# Altium PCB motor_driver.PcbDoc
Units mil, origin at the board's own origin, x right, y up, seen from the top; angles counter-clockwise.
Board outline 6000 x 4000 mil, 2 copper layers (Top Layer, Bottom Layer); 10 components, 9 nets, 41 pads, 0 vias.
Unrouted connection lines stored in the file: 30.
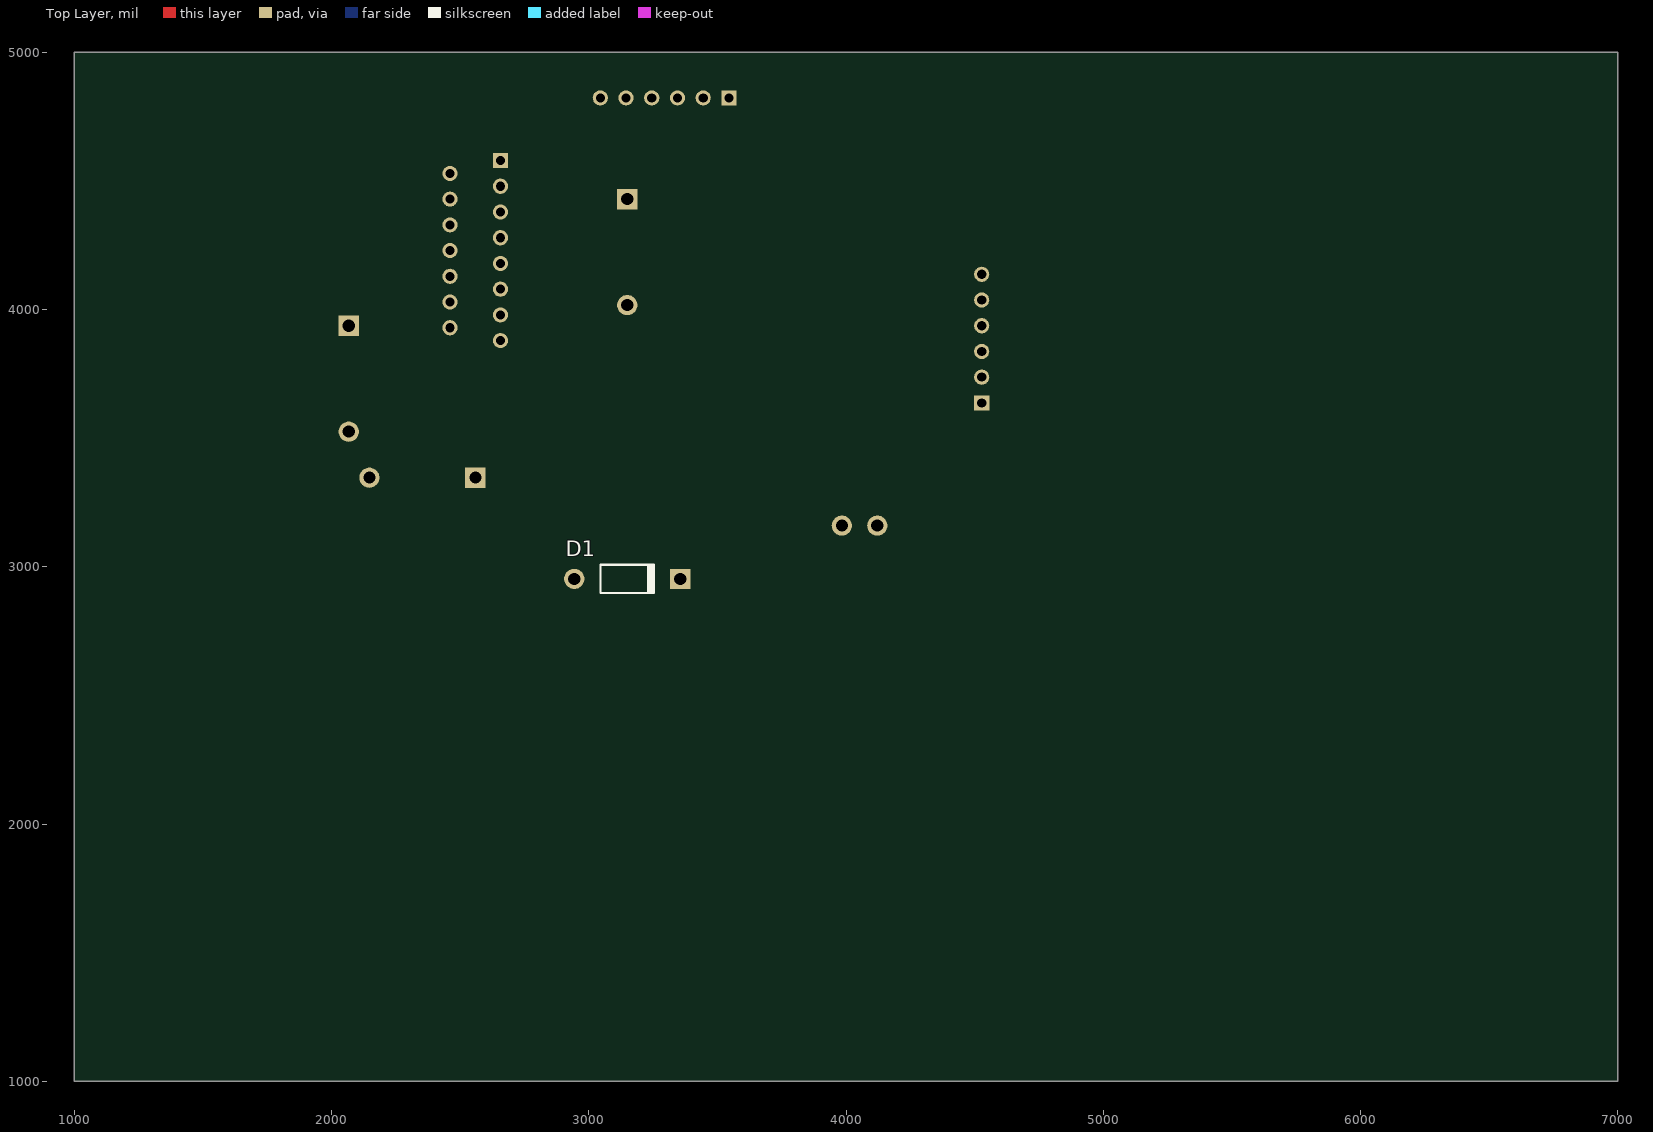
[diagram p0: Top Layer view]
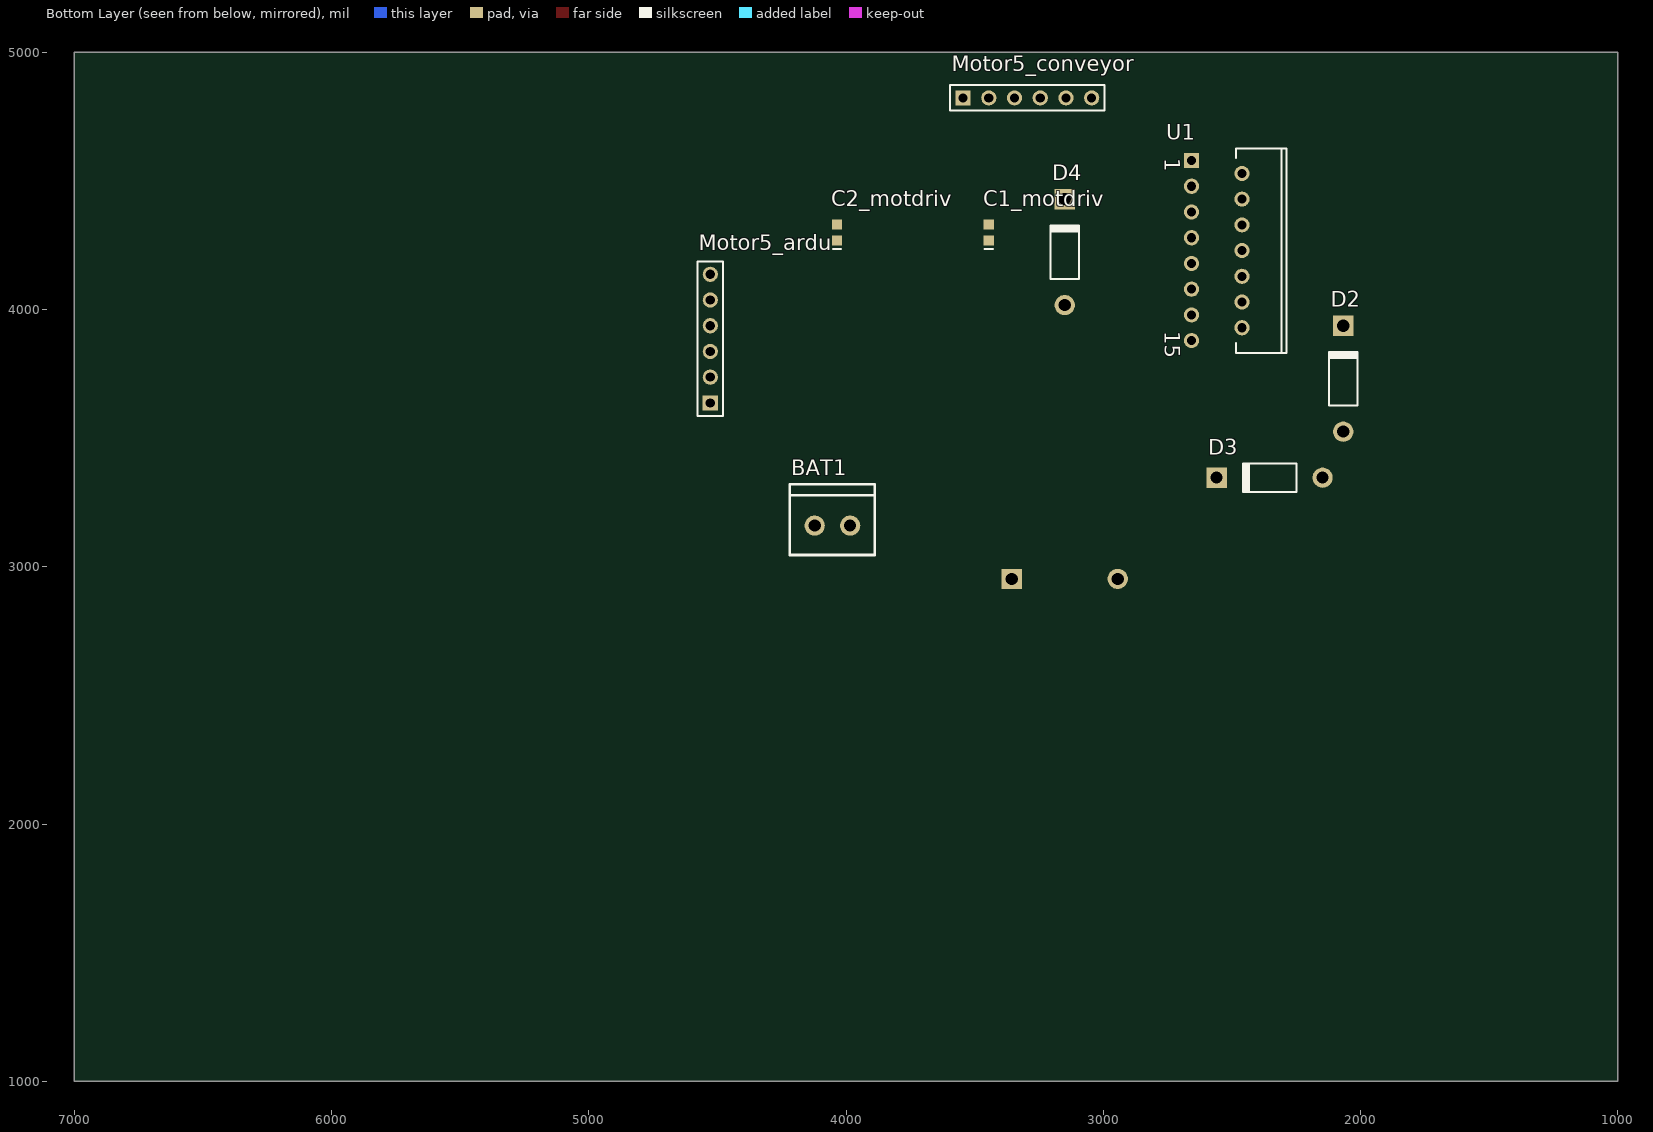
[diagram p1: Bottom Layer view, seen from below]

## Layer stack, top to bottom
Top Solder: solder mask 0.4, Solder Resist, Dk 3.5
Top Layer: signal copper 1.4
Dielectric 1: dielectric 12.6, FR-4, Dk 4.8
Bottom Layer: signal copper 1.4
Bottom Solder: solder mask 0.4, Solder Resist, Dk 3.5

## Board outline
1000,1000 7000,1000 7000,5000 1000,5000

## Design rules (kind name [scope] priority, off if disabled: settings)
Clearance [All] p1: gap=10 ignorepadtopadclearanceinfootprint=FALSE except(0: Arc-Hole Track-Hole SMDPad-Hole THPad-Hole Via-Hole Fill-Hole Poly-Hole Region-Hole Text-Hole)
PolygonConnect [All] p1: connectstyle=Relief reliefconductorwidth=10 reliefentries=4 polygonreliefangle="90 Angle" airgapwidth=10
RoutingVias [All] p1: holewidth=28 width=50 viastyle="Through Hole" minholewidth=28 minwidth=50 maxholewidth=28 maxwidth=50
SolderMaskExpansion [All] p1: expansion=4
Width [All] p1: maxlimit=10 minlimit=10 preferedwidth=10
30 further rules are at their usual default settings.

## Components (designator, comment, footprint, x,y, rotation, side; value= is the part's Value field where it differs from the comment)
BAT1 "Header 2" STL1550/2-3.5 4052.8,3160 r180 bottom
C1_motdriv "100nF" CAPC1608N 3444.88,4299.21 r90 bottom
C2_motdriv "100nF" CAPC1608N 4035.43,4299.21 r90 bottom
D1 "Diode 1N4001" DO-41 3149.61,2952.76 r0 top
D2 "Diode 1N4001" DO-41 2066.93,3731.1 r90 bottom
D3 "Diode 1N4001" DO-41 2353.15,3346.46 r0 bottom
D4 "Diode 1N4001" DO-41 3149.61,4223.23 r90 bottom
Motor5_ardu "Header 6" HDR1X6 4527.56,3637.01 r90 bottom
Motor5_conveyor "Header 6" HDR1X6 3544.88,4822.83 r180 bottom
U1 "L298N" MULTIWAT15 2558.66,4229.13 r270 bottom

## Footprints (in the part's own frame and the unit in brackets; to place one, negate y for a bottom-side part, rotate by r counter-clockwise, add the part's x,y. Pads: shape width x height; smd on the part's side, far side on the other; paste and mask are expansions set on the pad)
CAPC1608N [mm] "Chip Capacitor, Body 1.6x0.8mm, IPC Medium Density"
  rect 1x1 smd: 1(-0.8,0) 2(0.8,0)
  silkscreen extent -1.6,-0.4 -1.6,0.4, body extent -0.87,-0.48 0.87,0.48, height 0.85
DO-41 [mm] "Diode, Axial; Body 5.2 x 2.7 mm (LxDia. max), Lead Dia. 0.86 mm (max)"
  round 2 hole 1.2: 1(-5.23,0)
  rect 2x2 hole 1.2: 2(5.23,0)
  silkscreen extent -2.65,-1.4 2.75,1.4
HDR1X6 [mm] "Connector; Header; 6 Position"
  rect 1.5x1.5 hole 0.9: 1(0,0)
  round 1.5 hole 0.9: 2(2.54,0) 3(5.08,0) 4(7.62,0) 5(10.16,0) 6(12.7,0)
  silkscreen extent -1.27,-1.27 13.97,1.27
MULTIWAT15 [mm] "TO, Thru-Hole, Vertical, Heatsink Mounted; 15 Bent Staggered Leads; Pitch 1.27 mm"
  rect 1.5x1.5 hole 0.9: 1(-8.89,-2.49)
  round 1.5 hole 0.9: 2(-7.62,2.49) 3(-6.35,-2.49) 4(-5.08,2.49) 5(-3.81,-2.49) 6(-2.54,2.49) 7(-1.27,-2.49) 8(0,2.49) 9(1.27,-2.49) 10(2.54,2.49) 11(3.81,-2.49) 12(5.08,2.49) 13(6.35,-2.49) 14(7.62,2.49) 15(8.89,-2.49)
  silkscreen extent -10.1,1.89 10.1,6.89
STL1550/2-3.5 [mm] "STL1550 pin strip, 3.5 mm pitch"
  round 2 hole 1.2: 1(-1.75,0) 2(1.75,0)
  silkscreen extent -4.2,-2.9 4.2,4.1, body extent -4.2,-2.9 4.2,4.1, height 9.2

## Part data
BAT1: "Header, 2-Pin", LatestRevisionDate=17-Jul-2002, LatestRevisionNote="Re-released for DXP Platform.", Publisher="Altium Limited"
C1_motdriv C2_motdriv: library part Cap, "Capacitor", LatestRevisionDate=17-Jul-2002, LatestRevisionNote="Re-released for DXP Platform.", PackageDescription="Radial Cap, Thru-Hole; 2 Leads; 0.3 in Pin Spacing", PackageReference=RAD-0.3, Published=8-Jun-2000, Publisher="Altium Limited"
D1 D2 D3 D4: "1 Amp General Purpose Rectifier", Code_JEDEC=DO-204-AL, ComponentLink1Description="Manufacturer Link", ComponentLink1URL=http://www.fairchildsemi.com/, ComponentLink2Description=Datasheet, ComponentLink2URL=http://www.fairchildsemi.com/ds/1N%2F1N4001.pdf, DatasheetVersion=1998, LatestRevisionDate=17-Jul-2002, LatestRevisionNote="Re-released for DXP Platform.", PackageDescription="Diode, Axial; Body 5.2 x 2.7 mm (LxDia. max), Lead Dia. 0.86 mm (max)", PackageReference=DO-41, PackageVersion=Aug-1999, Published=8-Jun-2000, Publisher="Altium Limited"
Motor5_ardu Motor5_conveyor: "Header, 6-Pin", LatestRevisionDate=17-Jul-2002, LatestRevisionNote="Re-released for DXP Platform.", Publisher="Altium Limited"
U1: "Dual Full Bridge Driver", ComponentLink1Description="Manufacturer Link", ComponentLink1URL=http://www.st.com/, ComponentLink2Description=Datasheet, ComponentLink2URL=http://www.st.com/stonline/products/literature/ds/1773/l298.pdf, DatasheetVersion=Jul-1999, LatestRevisionDate=14-May-2007, LatestRevisionNote="Mapped to vertical PCB.", PackageDescription="TO, Thru-Hole, Vertical, Heatsink Mounted; 15 Bent Staggered Leads; Pitch 1.27 mm", PackageReference=Multiwatt15V, Published=8-Jun-2000, Publisher="Altium Limited"

## Nets (pads, with @x,y where several pads share a name; then routed paths per layer and width w, separated by ;. In a path a pad name is that pad's centre, name@x,y a point inside that pad or via, vN(x,y) a via of type N, cw(c..) or ccw(c..) an arc to the next point about the centre after c; other vN are vias at no path point)
7V2: BAT1.1 C2_motdriv.2 D1.2 D2.2 U1.4
GND: BAT1.2 C1_motdriv.1 C2_motdriv.1 D3.1 D4.1 Motor5_ardu.4 Motor5_conveyor.3 U1.1 U1.8 U1.10 U1.11 U1.12 U1.15
NetD1_1: D1.1 D3.2 Motor5_conveyor.1 U1.2
NetD2_1: D2.1 D4.2 Motor5_conveyor.2 U1.3
NetMotor5_ardu_1: Motor5_ardu.1 U1.5
NetMotor5_ardu_2: Motor5_ardu.2 U1.7
NetMotor5_ardu_5: Motor5_ardu.5 Motor5_conveyor.5
NetMotor5_ardu_6: Motor5_ardu.6 Motor5_conveyor.6
V5: C1_motdriv.2 Motor5_ardu.3 Motor5_conveyor.4 U1.6 U1.9
pads on no net: U1.13 U1.14

## Text inside footprints (layer, text, board x,y; h text height)
U1: Bottom Overlay "1" at 2760.04,4588.19 h59.06 r90; Bottom Overlay "15" at 2760.04,3916.54 h59.06 r90